# Altium PCB PCB.PcbDoc
Units mil, origin at the board's own origin, x right, y up, seen from the top; angles counter-clockwise.
Board outline 1055 x 890 mil, 2 copper layers (Top Layer, Bottom Layer); 12 components, 6 nets, 43 pads, 6 vias.
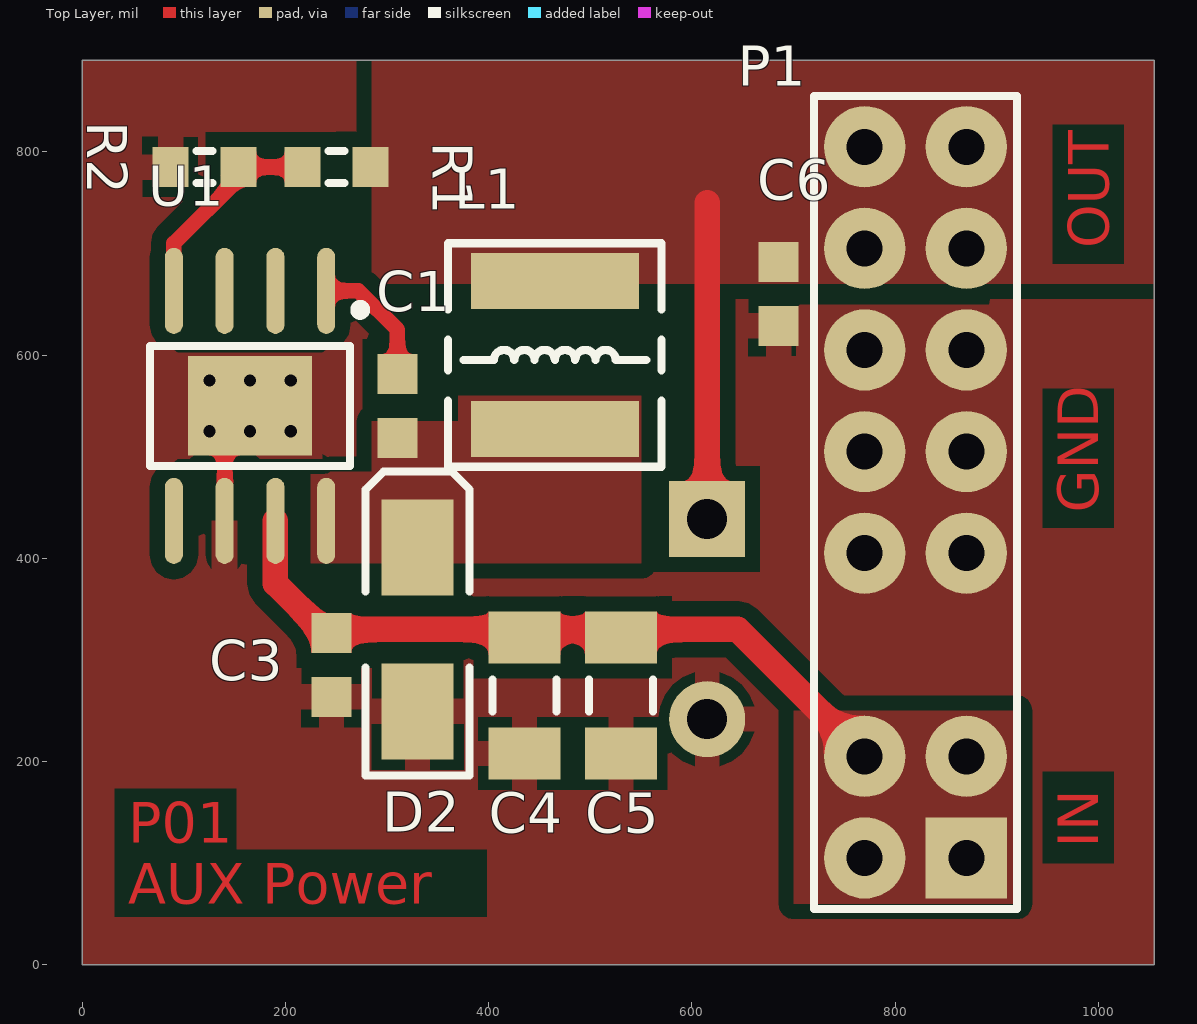
[diagram p0: Top Layer view]
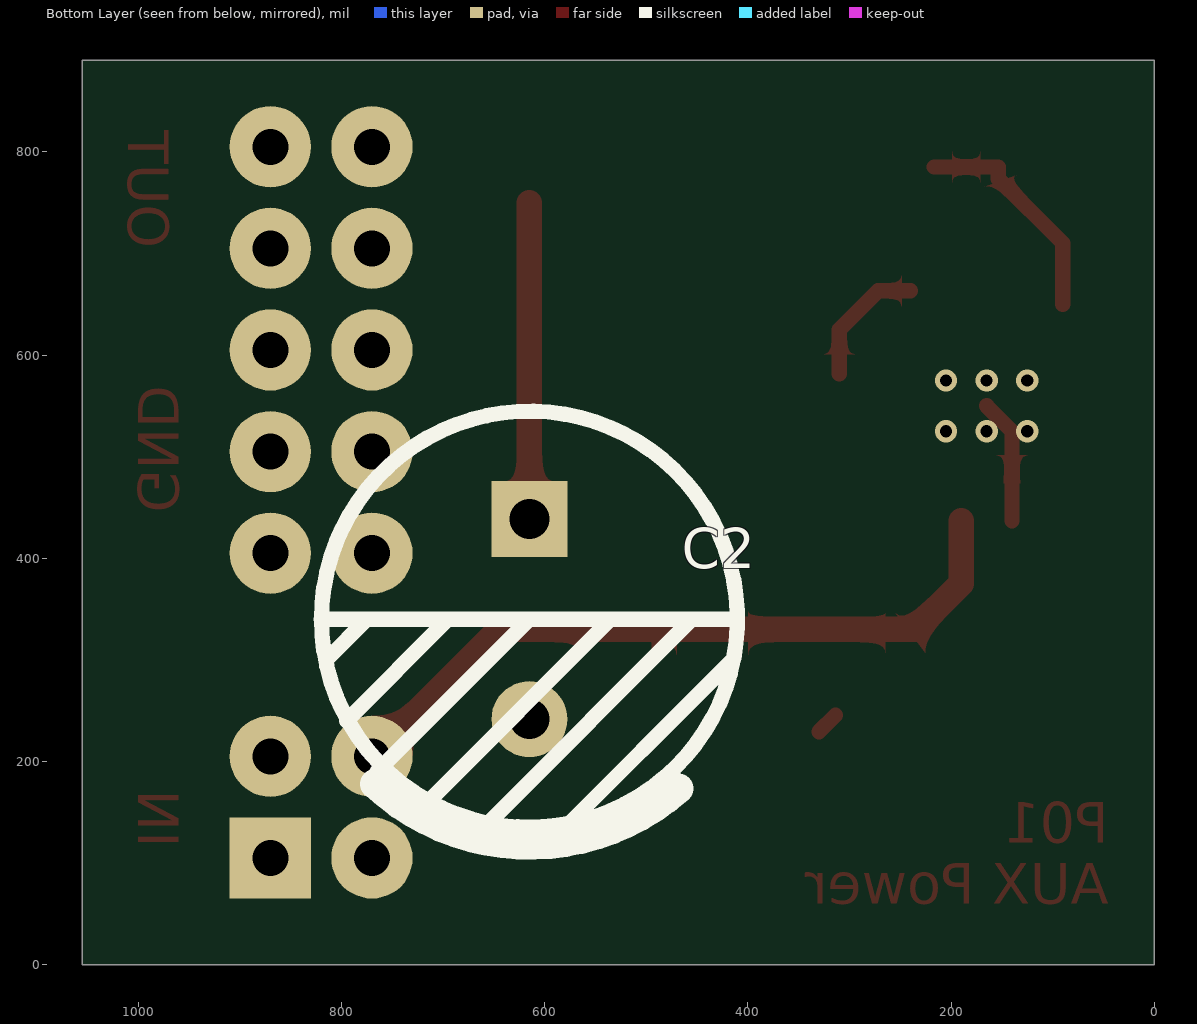
[diagram p1: Bottom Layer view, seen from below]

## Layer stack, top to bottom
Top Solder: solder mask 0.4, Solder Resist, Dk 3.5
Top Layer: signal copper 1.4
Dielectric 1: dielectric 12.6, FR-4, Dk 4.8
Bottom Layer: signal copper 1.4
Bottom Solder: solder mask 0.4, Solder Resist, Dk 3.5

## Board outline
0,0 0,890 1055,890 1055,0

## Design rules (kind name [scope] priority, off if disabled: settings)
Clearance [All] p1: gap=15 ignorepadtopadclearanceinfootprint=TRUE except(5: Fill-Text Poly-Text Region-Text)
PolygonConnect [All] p1: connectstyle=Relief reliefconductorwidth=25 reliefentries=4 polygonreliefangle="90 Angle" airgapwidth=10
RoomDefinition Sch [InComponentClass('Sch')] p1: confinementstyle=ConfineIn formatcopy=TRUE lockcomponents=FALSE outline -595,-1845 3955,-1845 3955,2095 -595,2095
RoutingVias [All] p1: holewidth=28 width=50 viastyle="Through Hole" minholewidth=28 minwidth=50 maxholewidth=28 maxwidth=50
SolderMaskExpansion [All] p1: expansion=4
Width [All] p1: maxlimit=40 minlimit=10 preferedwidth=10
30 further rules are at their usual default settings.

## Components (designator, comment, footprint, x,y, rotation, side; value= is the part's Value field where it differs from the comment)
C1 "10nF" CAP1608(0603) 310,550 r270 top
C2 "220uF/10V" "CAP 5.0*10*12.5 - BK" 615,340 r270 bottom
C3 "10nF" CAP1608(0603) 245,295 r270 top
C4 "4.7uF" CAPC3216N 435,265 r270 top
C5 "4.7uF" CAPC3216N 530,265 r270 top
C6 "100nF" CAP1608(0603) 685,660 r270 top
D2 "SS14" DIODE_SMA 330,330 r180 top
L1 "Inductor" NR5012 465,600 r90 top value=47uH
P1 "Header 8X2" HDR2X8 870,105 r90 top
R1 "10k" RES1608(0603) 250,785 r0 top
R2 "3.16k" RES1608(0603) 120,785 r0 top
U1 "TPS5450" TPS5450 165,550 r270 top

## Footprints (in the part's own frame and the unit in brackets; to place one, negate y for a bottom-side part, rotate by r counter-clockwise, add the part's x,y. Pads: shape width x height; smd on the part's side, far side on the other; paste and mask are expansions set on the pad)
CAP1608(0603) [mm]
  rect 1x1 smd: 1(-0.8,0) 2(0.8,0)
  body extent -0.87,-0.48 0.87,0.48, height 0.85
"CAP 5.0*10*12.5 - BK" [mm] "脚距5mm直径10mm高度12.5mm"
  rect 1.9x1.9 hole 1: 1(-2.5,0)
  round 1.9 hole 1: 2(2.5,0)
  silkscreen extent -5.2,-5.21 5.64,5.2, body extent -5,-5 5.01,5, height 12.54
CAPC3216N [mm] "Chip Capacitor, Body 3.2x1.6mm, IPC Medium Density"
  rect 1.3x1.8 smd: 1(-1.45,0) 2(1.45,0)
  silkscreen extent -0.4,-0.8 0.4,0.8, body extent -1.7,-0.9 1.7,0.9, height 1.35
DIODE_SMA [mm]
  rect 1.8x2.4 smd: 1(0,2.05) 2(0,-2.05)
  silkscreen extent -1.3,-3.95 1.3,3.65
HDR2X8 [mil] "Connector; Header; 8x2 Position"
  rect 80x80 hole 35.43: 1(0,0)
  round 80 hole 35.43: 2(0,100) 3(100,0) 4(100,100) 7(300,0) 8(300,100) 9(400,0) 10(400,100) 11(500,0) 12(500,100) 13(600,0) 14(600,100) 15(700,0) 16(700,100)
  silkscreen extent -50,-50 750,150
NR5012 [mm] "5.0mm*5.0mm*1.2mm(长*宽*高）"
  rect 1.4x4.2 smd: 1(-1.85,0) 2(1.85,0)
  silkscreen extent -2.79,-2.67 2.79,2.67, body extent -2.5,-2.5 2.5,2.5, height 1.3
RES1608(0603) [mm]
  rect 0.9x1 smd: 1(-0.85,0) 2(0.85,0)
  silkscreen extent -0.2,-0.4 0.2,0.4, body extent -0.85,-0.48 0.85,0.48, height 0.6
TPS5450 [mm]
  oval 2.15x0.45 smd: 1(-2.875,1.905) 2(-2.875,0.635) 3(-2.875,-0.635) 4(-2.875,-1.905) 5(2.875,-1.905) 6(2.875,-0.635) 7(2.875,0.635) 8(2.875,1.905)
  rect 2.49x3.1 smd: 9(0,0)
  silkscreen extent -2.52,-2.5 1.5,2.88, body extent -2.4,-2.5 2.4,2.5, height 1.75

## Part data
C1 C3 C4 C5 C6: library part Cap, "Capacitor", LatestRevisionDate=17-Jul-2002, LatestRevisionNote="Re-released for DXP Platform.", PackageDescription="Radial Cap, Thru-Hole; 2 Leads; 0.3 in Pin Spacing", PackageReference=RAD-0.3, Published=8-Jun-2000, Publisher="Altium Limited"
C2: library part "Cap Pol1", "Polarized Capacitor (Radial)", LatestRevisionDate=17-Jul-2002, LatestRevisionNote="Re-released for DXP Platform.", PackageDescription="Polarized Capacitor (Radial); 2 Leads", PackageReference=RB7.6-15, Published=8-Jun-2000, Publisher="Altium Limited"
D2: library part "D Schottky", "Schottky Diode", Code_JEDEC=DO-214-AA, LatestRevisionDate=17-Jul-2002, LatestRevisionNote="Re-released for DXP Platform.", PackageDescription="DO-214-AA/SMB; 2 C-Bend Leads; Body 5.3 x 3.6 mm, inc. leads (LxW)", PackageReference=SMB, Published=8-Jun-2000, Publisher="Altium Limited"
P1: "Header, 8-Pin, Dual row", LatestRevisionDate=17-Jul-2002, LatestRevisionNote="Re-released for DXP Platform.", Publisher="Altium Limited"
R1 R2: library part Res1, "Resistor", LatestRevisionDate=17-Jul-2002, LatestRevisionNote="Re-released for DXP Platform.", PackageDescription="Axial Device, Thru-Hole; 2 Leads; 0.3 in Pin Spacing", PackageReference=AXIAL-0.3, Published=8-Jun-2000, Publisher="Altium Limited"
L1: Code_IEC=1005, Code_JEITA=0402, LatestRevisionDate=29-May-2009, LatestRevisionNote="IPC-7351 Footprint Added.", PackageDescription="Chip Inductor", PackageReference=0402-A, Published=8-Jun-2000, Publisher="Altium Limited"

## Via types
v1: diameter 22, hole 12, Top Layer to Bottom Layer, 6 vias

## Nets (pads, with @x,y where several pads share a name; then routed paths per layer and width w, separated by ;. In a path a pad name is that pad's centre, name@x,y a point inside that pad or via, vN(x,y) a via of type N, cw(c..) or ccw(c..) an arc to the next point about the centre after c; other vN are vias at no path point)
GND: C2.2 C3.2 C4.2 C5.2 C6.2 D2.1 P1.7 P1.8 P1.9 P1.10 P1.11 P1.12 R2.1 U1.6 U1.9 | length 146.4
  Top Layer w15: U1.6 140,525 U1.9 ; D2.1@313.82,245.47 D2.1@330,229.29
  other v1: 125,525 165,525 205,525 125,575 165,575 205,575
NetC1_1: C1.1 U1.1 | length 129.3
  Top Layer w15: U1.1 271.81,663.19 310,625 C1.1
NetC1_2: C1.2 D2.2 L1.1 U1.8
NetR1_1: R1.1 R2.2 U1.4 | length 224.5
  Top Layer w15: U1.4@90,649.89 U1.4 90,710 153.46,773.46 R2.2 R1.1
VIN: C3.1 C4.1 C5.1 P1.1 P1.2 P1.3 P1.4 U1.7 | length 712.2
  Top Layer w25: U1.7 190,375 235,330 645,330 P1.4
VOUT: C2.1 C6.1 L1.2 P1.13 P1.14 P1.15 P1.16 R1.2 | length 311.6
  Top Layer w25: C2.1 615,750
pads on no net: U1.2 U1.3 U1.5

## Polygon pours and split planes (outlines as drawn)
GND on Top Layer "GND_L01_P608" (solid, remove dead copper, pour order 608): 1055,890 1055,0 0,0 0,890
VIN on Top Layer "VIN_L01_P588" (solid, remove dead copper, pour order 588): 700,250 920,250 920,60 700,60
GND on Top Layer "GND_L01_P296" (solid, remove dead copper, pour order 296): 93.98,602.25 236.02,602.25 236.02,497.75 93.98,497.75
VOUT on Top Layer "VOUT_L01_P602" (solid, remove dead copper, pour order 602): 1055,890 1055,670 285,670 285,890
NetC1_2 on Top Layer "NETC1_2_L01_P590" (solid, remove dead copper, pour order 590): 225,485 225,395 550,395 550,560 370,560 370,535 285,535 285,485
VOUT on Top Layer "VOUT_L01_P584" (solid, remove dead copper, pour order 584): 655,275
GND on Top Layer "GND_L01_P294" (solid, remove dead copper, pour order 294): 702.48,649.71 702.77,650 940,650 940,345 703,345
GND on Top Layer "GND_L01_P284" (solid, remove dead copper, pour order 284): 920,645 720,645 720,365 920,365
no net on Top Layer "NONET_L01_P224" (solid, remove dead copper, pour order 224): 223,480
no net on Top Layer "NONET_L01_P222" (solid, remove dead copper, pour order 222): 225,485
NetC1_2 on Top Layer "NETC1_2_L01_P220" (solid, pour order 220): 245,550
no net on Top Layer "Top Layer-GND 1" (solid, pour order 48): 1115,-145
no net on Top Layer "NONET_L01_P024" (solid, pour order 24): 1100,845
GND on Top Layer "Top Layer-GND 1" (solid, pour order 8): 1115,855

## Other copper
Top Layer:
  text "OUT" at 1010,705 h40 r90
  text "GND" at 1000,445 h40 r90
  text "P01" at 45,120 h40
  text "IN" at 1000,115 h40 r90
  text "AUX Power" at 45,60 h40

## Silkscreen, mask and mechanical layers (free items; w line width, h text height)
Mechanical 15:
  the board outline again, w10